# EAGLE board shd_v2.0_double 2 (EAGLE 9.5.2)
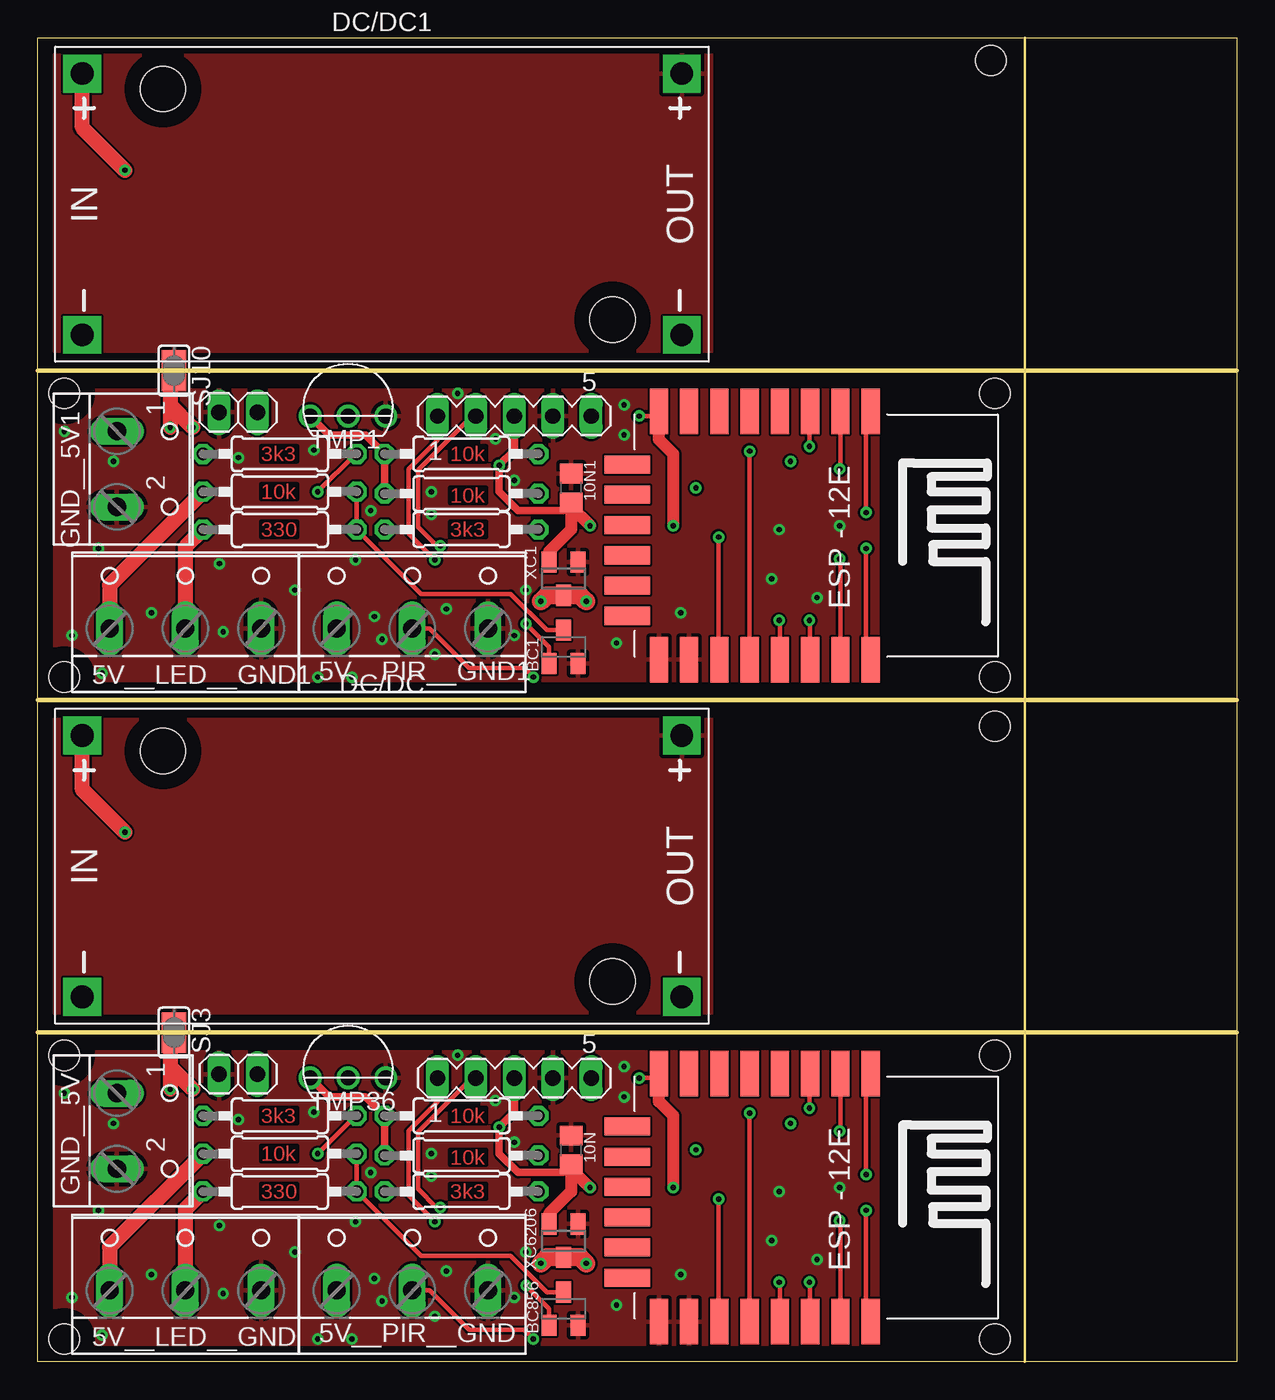
[diagram p0: board, top side]
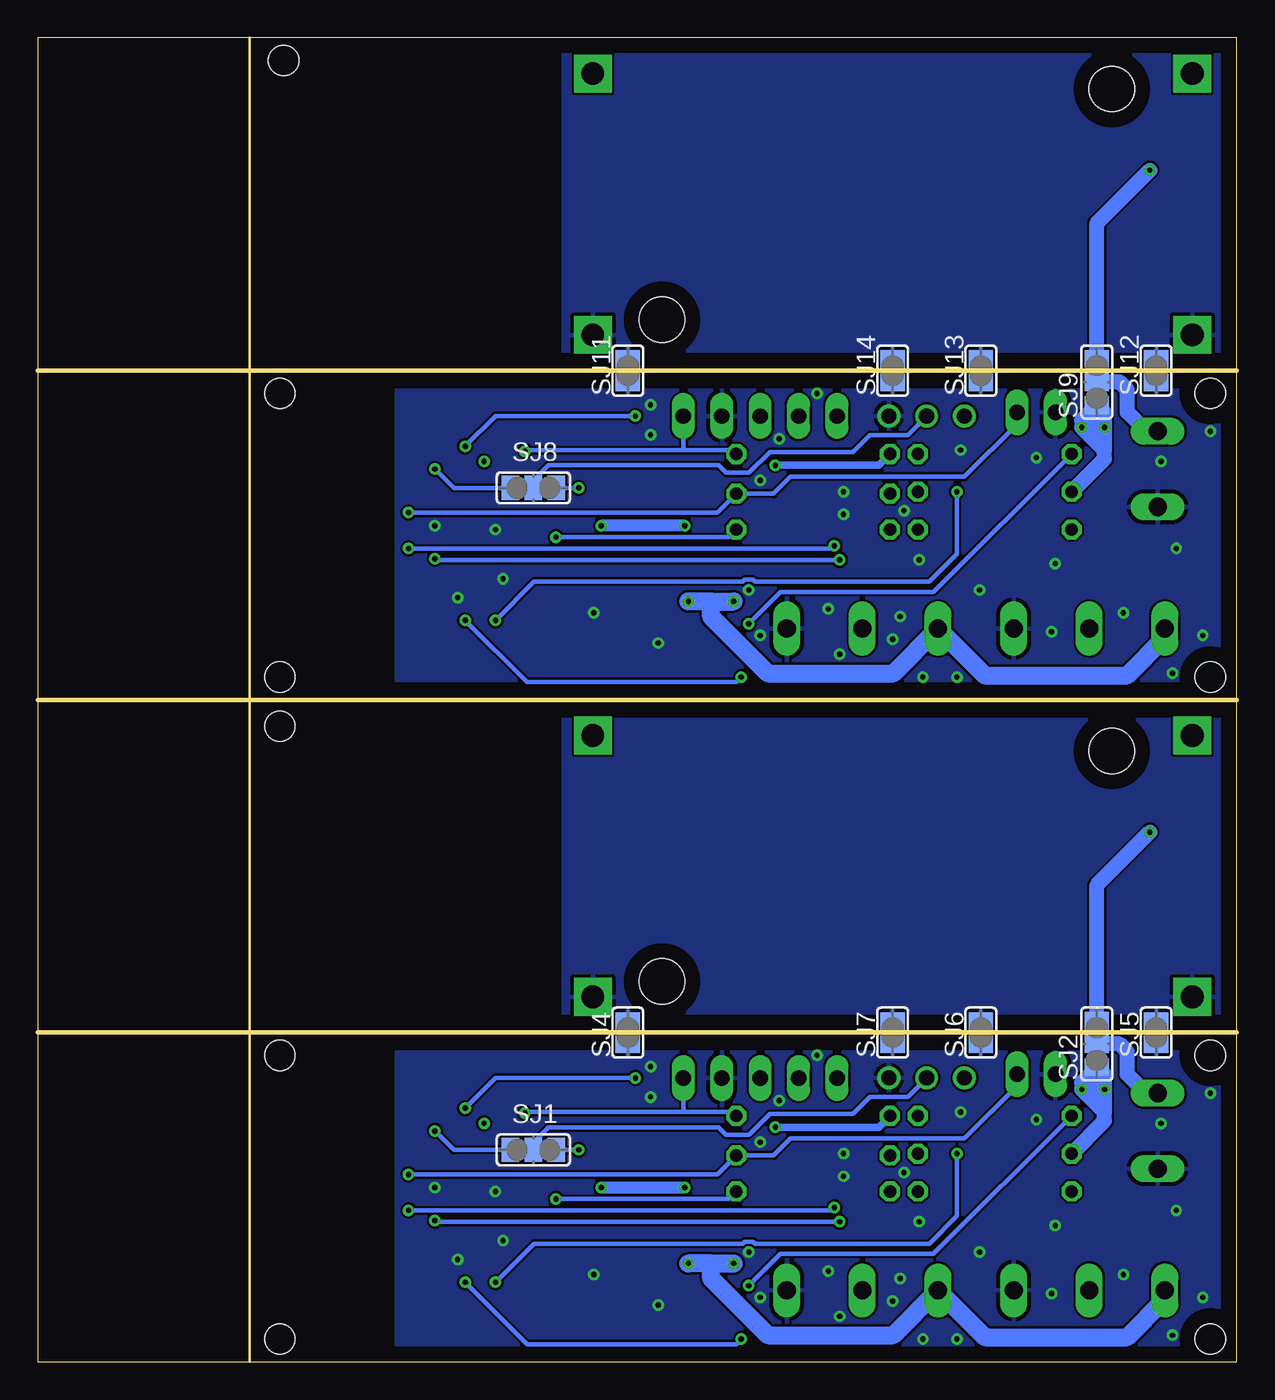
[diagram p1: board, bottom side, seen from below]

Size 79.25 x 87.5 mm. Coordinates in mm from the lower left corner, seen from the top.
Outline: 0,21.75 0,0 65.25,0
Outline: 0,21.75 0,43.75
Outline: 0,43.75 0,65.5
Outline: 0,65.5 0,87.5 65.25,87.5
Outline: 65.25,87.5 79.25,87.5 79.25,65.5
Outline: 79.25,65.5 79.25,43.75
Outline: 79.25,43.75 79.25,21.75
Outline: 79.25,21.75 79.25,0 65.25,0
Outline: 0,21.75 79.25,21.75
Outline: 0,43.75 79.25,43.75
Outline: 0,65.5 79.25,65.5
Outline: 65.25,87.5 65.25,0
Copper layers (1*16): Top 0.035mm / dielectric 1.5mm / Bottom 0.035mm
Design rules "default *": minimum track width 0.3mm, minimum drill 0.35mm, track to track 6mil, track to pad 6mil, pad to pad 6mil, via to via 6mil, smd to smd 6mil, copper to edge 40mil, drill to drill 6mil, minimum pad ring 10mil, minimum via ring 8mil, stop-mask expansion 4mil, vias tented up to drill 0mil, thermal gap 10mil
Holes 2 mm at 1.75,20.25 63.25,20.25 63.25,1.5 1.75,1.5 1.75,64 63.25,64 63.25,45.25 1.75,45.25 63.25,42 63,86

## Footprints (pad centres in the part's own frame; a part is rotated, then mirrored left to right if it is on the bottom)
W237-103 = drill 1.194 long: 1 -5,-1.29; 2 0,-1.29; 3 5,-1.29
C0805 = smd 1.3 x 1.5: 1 -0.95,0; 2 0.95,0
SOT23-BEC = smd 1 x 1.4: B -0.95,-1.1; C 0,1.1; E 0.95,-1.1
DC-DC-STEP-DOWN-LM2596 = drill 1.5 pad 2.5 square: IN+ -19.812,8.636; IN- -19.812,-8.636; OUT+ 19.812,8.636; OUT- 19.812,-8.636 | hole 3: -14.478,7.62; 15.24,-7.62
W237-102 = drill 1.194 long: 1 -2.5,-1.27; 2 2.5,-1.27
1X02 = drill 1.016 long: 1 -1.27,0; 2 1.27,0
MA05-1 = drill 1.016 long: 1 -5.08,0; 2 -2.54,0; 3 0,0; 4 2.54,0; 5 5.08,0
0207/10 = drill 0.813 octagon: 1 -5.08,0; 2 5.08,0
SJ_2 = smd 1.168 x 1.6: 1 -1.524,0; 2 0,0; 3 1.524,0
SJ = smd 1.168 x 1.6: 1 -0.762,0; 2 0.762,0
TO-92 = drill 1: 1 -2.5,0; 2 0,0; 3 2.5,0
ESP12E-SMD = smd 3 x 1.2: ADC -8.3,3.8; CH_PD -8.3,1.8; GND 8.1,-8.2; GPIO0 8.1,-2.2; GPIO2 8.1,-4.2; GPIO4 8.1,-0.2; GPIO5 8.1,1.8; GPIO12 -8.3,-4.2; GPIO13 -8.3,-6.2; GPIO14 -8.3,-2.2; GPIO15 8.1,-6.2; GPIO16 -8.3,-0.2; RESET -8.3,5.8; RXD0 8.1,3.8; TXD0 8.1,5.8; VCC -8.3,-8.2 | smd 1.2 x 3: CS0 -4.8,-10.3; GPIO9 -0.8,-10.3; GPIO10 1.2,-10.3; MISO -2.8,-10.3; MOSI 3.2,-10.3; SCLK 5.2,-10.3
SOT23 = smd 1 x 1.4: 1 -0.95,-1.1; 2 0.95,-1.1; 3 0,1.1

## Placement (x,y rotation side)
5V__LED__GND  [W237-103]  9.75,6 0 top
5V__LED__GND1  [W237-103]  9.75,49.75 0 top
5V__PIR__GND  [W237-103]  24.75,6 0 top
5V__PIR__GND1  [W237-103]  24.75,49.75 0 top
10N  [C0805]  35.25,14 90 top
10N1  [C0805]  35.25,57.75 90 top
BC1  [SOT23-BEC]  34.75,47.25 0 top
BC856  [SOT23-BEC]  34.75,3.5 0 top
DC/DC  DC-DC-STEP-DOWN-LM2596  [DC-DC-STEP-DOWN-LM2596]  22.75,32.75 0 top
DC/DC1  DC-DC-STEP-DOWN-LM2596  [DC-DC-STEP-DOWN-LM2596]  22.75,76.5 0 top
GND__5V  [W237-102]  6.5,15.25 270 top
GND__5V1  [W237-102]  6.5,59 270 top
JP1  [1X02]  13.25,19 0 top
JP2  [1X02]  13.25,62.75 0 top
PROG_INTERFACE  [MA05-1]  31.5,18.75 0 top
PROG_INTERFACE1  [MA05-1]  31.5,62.5 0 top
R_GPIO1  3k3  [0207/10]  28,55 0 top
R_GPIO2  3k3  [0207/10]  28,11.25 0 top
R_LED_B  3k3  [0207/10]  16,16.25 0 top
R_LED_B1  3k3  [0207/10]  16,60 0 top
R_LED_C  10k  [0207/10]  16,13.75 180 top
R_LED_C1  330  [0207/10]  16,11.25 0 top
R_LED_C2  10k  [0207/10]  16,57.5 180 top
R_LED_C3  330  [0207/10]  16,55 0 top
R_PROG  10k  [0207/10]  28,16.25 180 top
R_PROG1  10k  [0207/10]  28,60 180 top
R_RST  10k  [0207/10]  28,13.62 180 top
R_RST1  10k  [0207/10]  28,57.38 180 top
SJ1  [SJ_2]  46.5,14 0 bottom
SJ2  [SJ_2]  9.25,21 90 bottom
SJ3  [SJ]  9,21.75 270 top
SJ4  [SJ]  40.25,21.75 90 bottom
SJ5  [SJ]  5.33,21.75 90 bottom
SJ6  [SJ]  16.92,21.75 90 bottom
SJ7  [SJ]  22.75,21.75 90 bottom
SJ8  [SJ_2]  46.5,57.75 0 bottom
SJ9  [SJ_2]  9.25,64.75 90 bottom
SJ10  [SJ]  9,65.5 270 top
SJ11  [SJ]  40.25,65.5 90 bottom
SJ12  [SJ]  5.33,65.5 90 bottom
SJ13  [SJ]  16.92,65.5 90 bottom
SJ14  [SJ]  22.75,65.5 90 bottom
TMP1  TMP36  [TO-92]  20.5,62.5 0 top
TMP36  TMP36  [TO-92]  20.5,18.75 0 top
U1  [ESP12E-SMD]  49.25,10.75 270 top
U2  [ESP12E-SMD]  49.25,54.5 270 top
XC1  [SOT23]  34.75,51.75 180 top
XC6206  [SOT23]  34.75,8 180 top

## Library data of the parts
5V__LED__GND 5V__LED__GND1 5V__PIR__GND 5V__PIR__GND1 = con-wago-500; MPN: 237-103; OC_FARNELL: unknown; OC_NEWARK: 18M7116
10N 10N1 = eagle-ltspice; SPICEMODEL: NONE; SPICEPREFIX: C
BC1 BC856 = transistor
DC/DC DC/DC1 = diy-modules
GND__5V GND__5V1 = con-wago-500; MPN: 237-102; OC_FARNELL: unknown; OC_NEWARK: 70K9898
JP1 JP2 = pinhead
PROG_INTERFACE PROG_INTERFACE1 = con-lstb; OC_FARNELL: unknown; OC_NEWARK: unknown
R_GPIO1 R_GPIO2 R_LED_B R_LED_B1 R_LED_C R_LED_C1-R_LED_C3 R_PROG R_PROG1 R_RST R_RST1 = eagle-ltspice; SPICEMODEL: NONE; SPICEPREFIX: R
SJ1-SJ14 = jumper
TMP1 TMP36 = tmp36
U1 U2 = esp8266modules
XC1 XC6206 = Voltage Regulator

## Nets
GND: 5V__LED__GND.3 5V__PIR__GND.3 10N.2 BC856.E GND__5V.2 JP1.1 PROG_INTERFACE.4 SJ4.1 SJ5.1 SJ6.1 SJ7.1 TMP36.3 U1.GND U1.GPIO15 XC6206.1
GND1: 5V__LED__GND1.3 5V__PIR__GND1.3 10N1.2 BC1.E GND__5V1.2 JP2.1 PROG_INTERFACE1.4 SJ11.1 SJ12.1 SJ13.1 SJ14.1 TMP1.3 U2.GND U2.GPIO15 XC1.1
GND_STEP_DOWN: DC/DC.IN- DC/DC.OUT- SJ4.2 SJ5.2 SJ6.2 SJ7.2
GND_STEP_DOWN1: DC/DC1.IN- DC/DC1.OUT- SJ11.2 SJ12.2 SJ13.2 SJ14.2
GPIO0: PROG_INTERFACE.5 R_PROG.1 U1.GPIO0
GPIO1: PROG_INTERFACE1.5 R_PROG1.1 U2.GPIO0
LED_DATA_3.1: R_LED_B1.2 U2.GPIO4
LED_DATA_3.3: R_LED_B.2 U1.GPIO4
LED_DATA_3.3_R: BC856.B R_LED_B.1
LED_DATA_3.3_R1: BC1.B R_LED_B1.1
LED_DATA_5.0: BC856.C R_LED_C1.2 R_LED_C.1
LED_DATA_5.1: BC1.C R_LED_C2.1 R_LED_C3.2
LED_DATA_OUT: 5V__LED__GND.2 R_LED_C1.1
LED_DATA_OUT1: 5V__LED__GND1.2 R_LED_C3.1
N$1: R_GPIO1.2 U2.GPIO2
N$2: R_GPIO2.2 U1.GPIO2
PIR: 5V__PIR__GND.2 U1.GPIO5
PIR1: 5V__PIR__GND1.2 U2.GPIO5
RST: JP1.2 R_RST.1 U1.RESET
RST1: JP2.2 R_RST1.1 U2.RESET
RX: PROG_INTERFACE.1 U1.RXD0
RX1: PROG_INTERFACE1.1 U2.RXD0
TMP_ANA: SJ1.1 U1.ADC
TMP_ANA1: SJ8.1 U2.ADC
TMP_DATA: SJ1.3
TMP_DATA1: SJ8.3
TX: PROG_INTERFACE.2 U1.TXD0
TX1: PROG_INTERFACE1.2 U2.TXD0
V_IN: GND__5V.1 SJ2.2
V_IN1: GND__5V1.1 SJ9.2
V_IN_1: DC/DC.IN+ SJ2.3
V_IN_2: DC/DC1.IN+ SJ9.3
V_TMP: SJ1.2 TMP36.2
V_TMP1: SJ8.2 TMP1.2
VCC_5.0: 5V__LED__GND.1 5V__PIR__GND.1 R_LED_C.2 SJ2.1 SJ3.2 XC6206.3
VCC_5.1: 5V__LED__GND1.1 5V__PIR__GND1.1 R_LED_C2.2 SJ9.1 SJ10.2 XC1.3
VCC_STEP_DOWN: DC/DC.OUT+ SJ3.1
VCC_STEP_DOWN1: DC/DC1.OUT+ SJ10.1
VDD: R_GPIO2.1
VDD1: R_GPIO1.1
VDD_3.1: 10N1.1 PROG_INTERFACE1.3 R_PROG1.2 R_RST1.2 TMP1.1 U2.CH_PD U2.VCC XC1.2
VDD_3.3: 10N.1 PROG_INTERFACE.3 R_PROG.2 R_RST.2 TMP36.1 U1.CH_PD U1.VCC XC6206.2

## Tracks (layer width: path | path; a pad name or v marks a point on that pad's centre or on a via)
GND  (via drill 0.35)
  other vias: 2.25,4.25 4.25,1.75 4,10 5,15.75 12,9 17,7.25 22.25,5.5 22.75,4 27,6 26.25,3 38.25,3.75 42.5,5.75 48.5,8 51.5,6.75 53,11.5 49,11.25 38.75,17.5 38.75,19.5 26,13.75 13.25,16 26,12.25 21,9.25 18.25,16.5 32.25,7.25 31.5,14.5 1.75,17.75 30.25,17.25 31.5,4.25 22,12.5 20.75,1.5 18.5,1.5 7.5,5.75 12.25,4.5 27.75,20.25
  pour Top: -0.75,21.5 -0.75,-1 55.5,-1 55.5,21.5
  pour Bottom: -0.75,21.5 -0.75,-1 55.5,-1 55.5,21.5
GND1  (via drill 0.35)
  other vias: 2.25,48 4.25,45.5 4,53.75 5,59.5 12,52.75 17,51 22.25,49.25 22.75,47.75 27,49.75 26.25,46.75 38.25,47.5 42.5,49.5 48.5,51.75 51.5,50.5 53,55.25 49,55 38.75,61.25 38.75,63.25 26,57.5 13.25,59.75 26,56 21,53 18.25,60.25 32.25,51 31.5,58.25 1.75,61.5 30.25,61 31.5,48 22,56.25 20.75,45.25 18.5,45.25 7.5,49.5 12.25,48.25 27.75,64
  pour Top: -0.75,65.25 -0.75,44 55.5,44 55.5,65.25
  pour Bottom: -0.75,65.25 -0.75,44 55.5,44 55.5,65.25
GND_STEP_DOWN
  pour Bottom: -0.75,22 -0.75,43.5 44.5,43.5 44.5,22
GND_STEP_DOWN1
  pour Bottom: -0.75,65.75 -0.75,87.75 44.5,87.75 44.5,65.75
GPIO0  (via drill 0.35)
  Top 0.3: U1.GPIO0 v47.05,16.43
  Bottom 0.3: PROG_INTERFACE.5 36.58,16.5 | v47.05,16.43 46.98,16.5 36.58,16.5 | 36.58,16.5 33.33,16.5 R_PROG.1
GPIO1  (via drill 0.35)
  Top 0.3: U2.GPIO0 v47.05,60.18
  Bottom 0.3: PROG_INTERFACE1.5 36.58,60.25 | v47.05,60.18 46.98,60.25 36.58,60.25 | 36.58,60.25 33.33,60.25 R_PROG1.1
LED_DATA_3.1  (via drill 0.35)
  Top 0.3: U2.GPIO4 49.05,48.95 v49,49 | R_LED_B1.2 21,60 v18.5,57.5
  Bottom 0.3: v49,49 46.44,51.56 32.66,51.56 32.53,51.68 31.97,51.68 31.84,51.56 20.33,51.56 18.5,53.38 v18.5,57.5
LED_DATA_3.3  (via drill 0.35)
  Top 0.3: U1.GPIO4 49.05,5.2 v49,5.25 | R_LED_B.2 21,16.25 v18.5,13.75
  Bottom 0.3: v49,5.25 46.44,7.81 32.66,7.81 32.53,7.93 31.97,7.93 31.84,7.81 20.33,7.81 18.5,9.63 v18.5,13.75
LED_DATA_3.3_R  (via drill 0.35)
  Top 0.3: v32.27,5.02 33.8,3.49 BC856.B
  Bottom 0.3: R_LED_B.1 20.05,7.12 30.16,7.12 v32.27,5.02
LED_DATA_3.3_R1  (via drill 0.35)
  Top 0.3: v32.27,48.77 33.8,47.24 BC1.B
  Bottom 0.3: R_LED_B1.1 20.05,50.88 30.16,50.88 v32.27,48.77
LED_DATA_5.0
  Top 0.3: R_LED_C.1 R_LED_C1.2 25.33,7 31.25,7 33.65,4.6 BC856.C
LED_DATA_5.1
  Top 0.3: R_LED_C2.1 R_LED_C3.2 25.33,50.75 31.25,50.75 33.65,48.35 BC1.C
LED_DATA_OUT
  Top 1: R_LED_C1.1 9.75,10.08 5V__LED__GND.2
LED_DATA_OUT1
  Top 1: R_LED_C3.1 9.75,53.83 5V__LED__GND1.2
N$1  (via drill 0.35)
  Top 0.3: U2.GPIO2 45,46.45 v45,54.5
  Bottom 0.3: v45,54.5 33.58,54.5 R_GPIO1.2
N$2  (via drill 0.35)
  Top 0.3: U1.GPIO2 45,2.7 v45,10.75
  Bottom 0.3: v45,10.75 33.58,10.75 R_GPIO2.2
N$3  (via drill 0.35)
  other vias: 49.75,15.75
N$4  (via drill 0.35)
  other vias: 49.75,59.5
PIR  (via drill 0.35)
  Top 0.3: v51,5.25 51.05,5.2 U1.GPIO5 | v32.75,1.5 32.15,2.1 28.5,2.1 25.89,4.71 5V__PIR__GND.2
  Bottom 0.3: v32.75,1.5 33.08,1.17 46.92,1.17 v51,5.25
PIR1  (via drill 0.35)
  Top 0.3: v51,49 51.05,48.95 U2.GPIO5 | v32.75,45.25 32.15,45.85 28.5,45.85 25.89,48.46 5V__PIR__GND1.2
  Bottom 0.3: v32.75,45.25 33.08,44.92 46.92,44.92 v51,49
RST  (via drill 0.35)
  Top 0.3: U1.RESET 54.75,18.75 v54.75,12.38
  Bottom 0.3: v54.75,12.38 34.33,12.38 R_RST.1 30.62,13.62 29.5,14.75 18,14.75 14.52,18.23 JP1.2
RST1  (via drill 0.35)
  Top 0.3: U2.RESET 54.75,62.5 v54.75,56.12
  Bottom 0.3: v54.75,56.12 34.33,56.12 R_RST1.1 30.62,57.38 29.5,58.5 18,58.5 14.52,61.98 JP2.2
RX  (via drill 0.35)
  Top 0.3: U1.RXD0 53.05,9.27 v53,9.32 | PROG_INTERFACE.1 26.42,17.17 24.5,15.25 24.5,11 v26.25,9.25
  Bottom 0.3: v26.25,9.25 52.93,9.25 v53,9.32
RX1  (via drill 0.35)
  Top 0.3: U2.RXD0 53.05,53.02 v53,53.07 | PROG_INTERFACE1.1 26.42,60.92 24.5,59 24.5,54.75 v26.25,53
  Bottom 0.3: v26.25,53 52.93,53 v53,53.07
TMP_ANA  (via drill 0.35)
  Top 0.3: U1.ADC 53.05,15.3 v53,15.25
  Bottom 0.3: SJ1.1 51.75,14 v53,15.25
TMP_ANA1  (via drill 0.35)
  Top 0.3: U2.ADC 53.05,59.05 v53,59
  Bottom 0.3: SJ8.1 51.75,57.75 v53,59
TMP_DATA  (via drill 0.35)
  Bottom 0.3: SJ1.3 v43.5,14
TMP_DATA1  (via drill 0.35)
  Bottom 0.3: SJ8.3 v43.5,57.75
TX  (via drill 0.35)
  Top 0.3: v26.6,10.19 26.35,10.19 25.12,11.41 25.12,15.19 28.69,18.75 PROG_INTERFACE.2 | U1.TXD0 54.75,2.95 v54.75,10
  Bottom 0.3: v26.6,10.19 26.6,10 v54.75,10
TX1  (via drill 0.35)
  Top 0.3: v26.6,53.94 26.35,53.94 25.12,55.16 25.12,58.94 28.69,62.5 PROG_INTERFACE1.2 | U2.TXD0 54.75,46.7 v54.75,53.75
  Bottom 0.3: v26.6,53.94 26.6,53.75 v54.75,53.75
V_IN
  Bottom 1: GND__5V.1 6,17.75 7.25,19 7.25,20.5 7.75,21 SJ2.2
V_IN1
  Bottom 1: GND__5V1.1 6,61.5 7.25,62.75 7.25,64.25 7.75,64.75 SJ9.2
V_IN_1  (via drill 0.35)
  Top 1: v5.75,35 2.94,37.81 DC/DC.IN+
  Bottom 1: SJ2.3 9.25,31.5 v5.75,35
V_IN_2  (via drill 0.35)
  Top 1: v5.75,78.75 2.94,81.56 DC/DC1.IN+
  Bottom 1: SJ9.3 9.25,75.25 v5.75,78.75
V_TMP
  Bottom 0.3: TMP36.2 21.75,17.5 24.25,17.5 25.38,16.38 30.88,16.38 32.25,15 33.75,15 34.25,15.5 45.5,15.5 46.5,14.5 SJ1.2
V_TMP1
  Bottom 0.3: TMP1.2 21.75,61.25 24.25,61.25 25.38,60.12 30.88,60.12 32.25,58.75 33.75,58.75 34.25,59.25 45.5,59.25 46.5,58.25 SJ8.2
VCC_5.0  (via drill 0.35)
  Top 1: SJ3.2 8.75,20.74 8.75,19.5 | 8.75,19.5 v8.75,18 | v10.25,18 8.75,19.5 | R_LED_C.2 4.75,7.58 5V__LED__GND.1
  Top 1.2: v36.25,6.5 35.85,6.9 XC6206.3 33.65,6.9 v33.25,6.5
  Bottom 1: v10.25,18 10.25,18.48 SJ2.1 8.75,18.98 v8.75,18 | v8.75,18 8.75,16.5 | v8.75,18 v10.25,18 | v10.25,18 8.75,16.5 | R_LED_C.2 8.75,15.92 8.75,16.5
  Bottom 1.2: 34.75,6.5 v36.25,6.5 | 34.75,6.5 v33.25,6.5 | 34.75,6.5 34.75,5.5 31,1.75 22.71,1.75 5V__PIR__GND.1 16.66,1.62 7.25,1.62 4.75,4.12 5V__LED__GND.1
VCC_5.1  (via drill 0.35)
  Top 1: SJ10.2 8.75,64.49 8.75,63.25 | 8.75,63.25 v8.75,61.75 | v10.25,61.75 8.75,63.25 | R_LED_C2.2 4.75,51.33 5V__LED__GND1.1
  Top 1.2: v36.25,50.25 35.85,50.65 XC1.3 33.65,50.65 v33.25,50.25
  Bottom 1: v10.25,61.75 10.25,62.23 SJ9.1 8.75,62.73 v8.75,61.75 | v8.75,61.75 8.75,60.25 | v8.75,61.75 v10.25,61.75 | v10.25,61.75 8.75,60.25 | R_LED_C2.2 8.75,59.67 8.75,60.25
  Bottom 1.2: 34.75,50.25 v36.25,50.25 | 34.75,50.25 v33.25,50.25 | 34.75,50.25 34.75,49.25 31,45.5 22.71,45.5 5V__PIR__GND1.1 16.66,45.37 7.25,45.37 4.75,47.87 5V__LED__GND1.1
VCC_STEP_DOWN
  pour Top: -0.75,22 -0.75,43.5 44.5,43.5 44.5,22
VCC_STEP_DOWN1
  pour Top: -0.75,65.75 -0.75,87.75 44.25,87.75 44.5,87.5 44.5,65.75
VDD_3.1  (via drill 0.35)
  Top 0.3: v51,60.5 51,62.75 U2.CH_PD | U2.VCC 40.75,62.5 v39.75,62.5
  Top 0.5: R_RST1.2 R_PROG1.2 21.67,61.25 19.25,61.25 TMP1.1 | 10N1.1 34.7,56.25 31.75,56.25 30.5,57.5 v30.5,59.25 31.5,60.25 PROG_INTERFACE1.3
  Top 0.8: XC1.2 33.8,53.55 35.25,55 10N1.1 35.25,56.5 v36.5,55.25 | v42,55.25 42,60 41.05,60.95 U2.VCC
  Bottom 0.3: v39.75,62.5 49,62.5 v51,60.5
  Bottom 0.5: R_PROG1.2 23.67,59.25 v30.5,59.25
  Bottom 0.8: v36.5,55.25 v42,55.25
VDD_3.3  (via drill 0.35)
  Top 0.3: v51,16.75 51,19 U1.CH_PD | U1.VCC 40.75,18.75 v39.75,18.75
  Top 0.5: R_RST.2 R_PROG.2 21.67,17.5 19.25,17.5 TMP36.1 | 10N.1 34.7,12.5 31.75,12.5 30.5,13.75 v30.5,15.5 31.5,16.5 PROG_INTERFACE.3
  Top 0.8: XC6206.2 33.8,9.8 35.25,11.25 10N.1 35.25,12.75 v36.5,11.5 | v42,11.5 42,16.25 41.05,17.2 U1.VCC
  Bottom 0.3: v39.75,18.75 49,18.75 v51,16.75
  Bottom 0.5: R_PROG.2 23.67,15.5 v30.5,15.5
  Bottom 0.8: v36.5,11.5 v42,11.5

## Text on the board
Top: 3k3 | 10k | 10k | 10k | 330 | 3k3 | 3k3 | 10k | 10k | 10k | 330 | 3k3